# Altium PCB JLINK V8_V1.PcbDoc
Units mm, origin at the board's own origin, x right, y up, seen from the top; angles counter-clockwise.
Board outline 69.48 x 46.62 mm, 2 copper layers (Top Layer, Bottom Layer); 71 components, 76 nets, 356 pads, 91 vias.
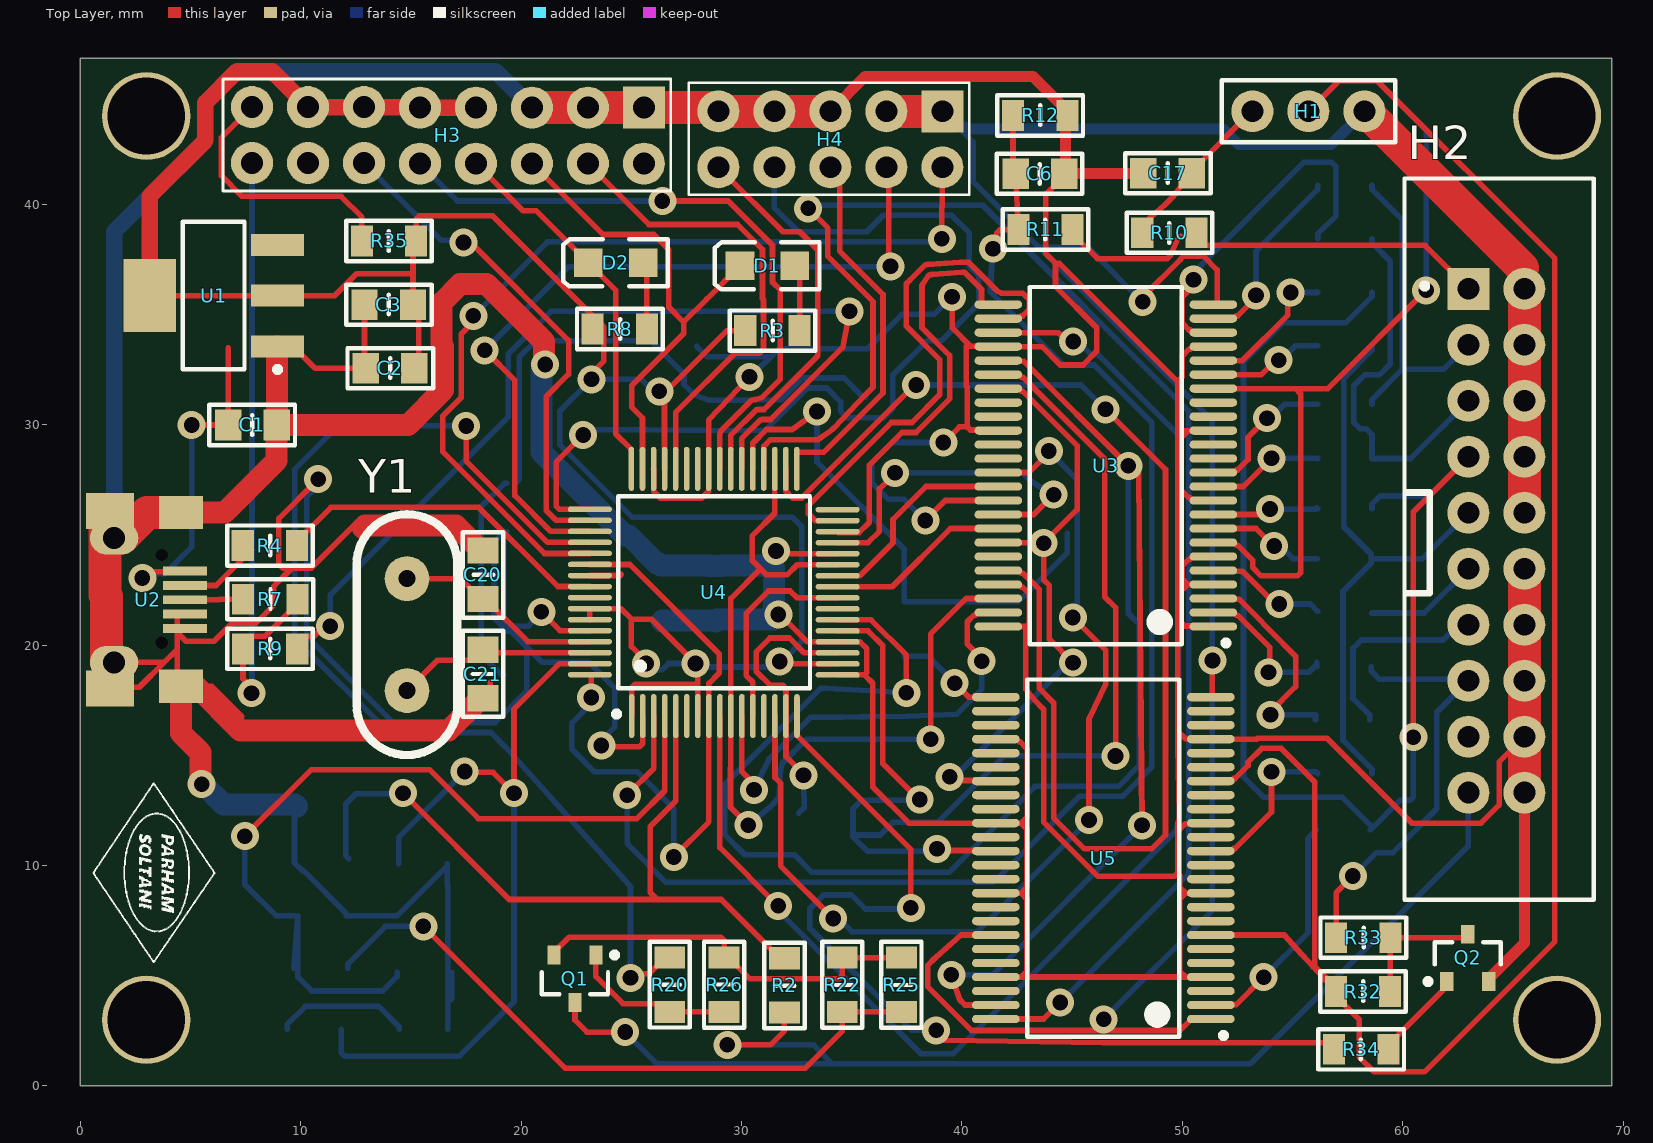
[diagram p0: Top Layer view]
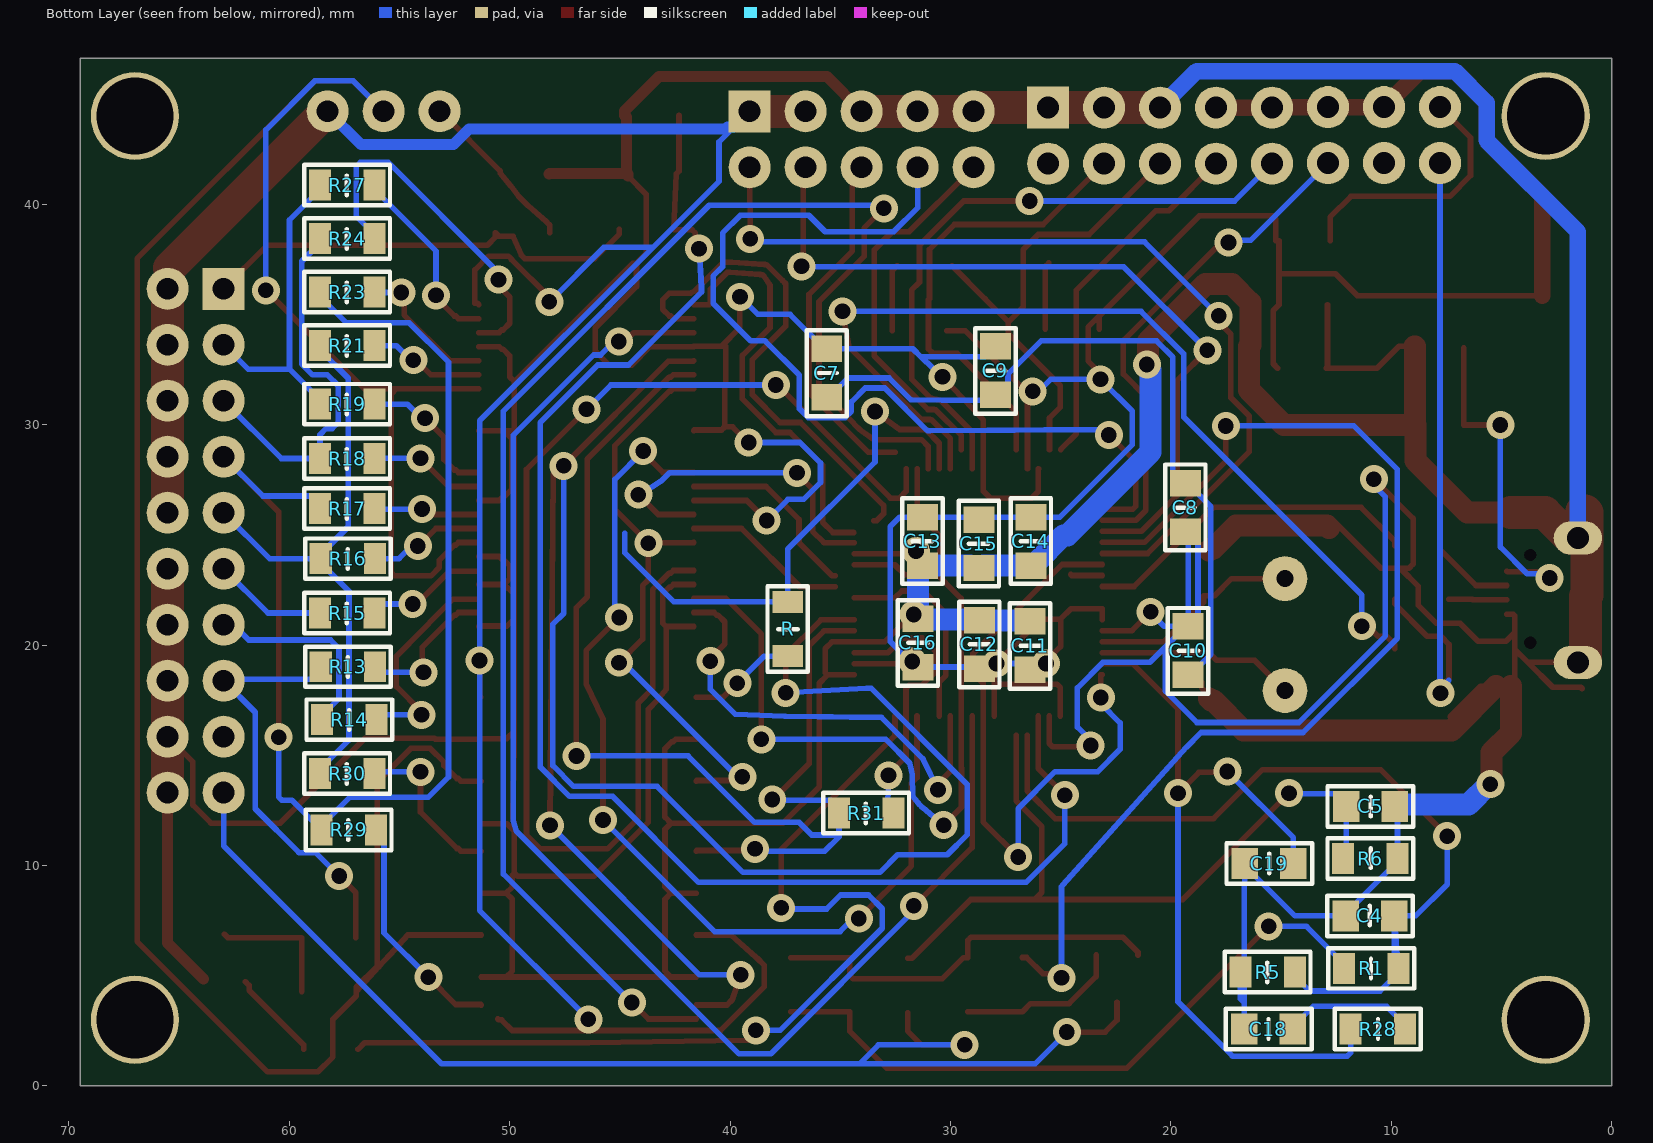
[diagram p1: Bottom Layer view, seen from below]

## Layer stack, top to bottom
Top Solder: solder mask 0.0102, Solder Resist, Dk 3.5
Top Layer: signal copper 0.0356
Dielectric 1: dielectric 0.32, FR-4, Dk 4.8
Bottom Layer: signal copper 0.0356
Bottom Solder: solder mask 0.0102, Solder Resist, Dk 3.5

## Board outline
0,0 69.485,0 69.485,46.624 0,46.624

## Design rules (kind name [scope] priority, off if disabled: settings)
Clearance POLYGON [InPolygon] p1: gap=0.635 ignorepadtopadclearanceinfootprint=FALSE except(0: Arc-Hole Track-Hole SMDPad-Hole THPad-Hole Via-Hole Fill-Hole Poly-Hole Region-Hole Text-Hole)
Clearance [All] p2: gap=0.305 ignorepadtopadclearanceinfootprint=TRUE except(0: Arc-Hole Track-Hole SMDPad-Hole THPad-Hole Via-Hole Fill-Hole Poly-Hole Region-Hole Text-Hole; 0.2: Arc-Arc Arc-Track Arc-SMDPad Track-Track Track-SMDPad SMDPad-SMDPad)
PlaneConnect [All] p1: planeconnectstyle=Direct reliefexpansion=0.508 reliefentries=4 reliefconductorwidth=0.254 reliefairgap=0.254
PolygonConnect [All] p1: connectstyle=Direct reliefconductorwidth=0.254 reliefentries=4 polygonreliefangle="90 Angle" airgapwidth=0.254
RoutingVias [All] p1: holewidth=0.711 width=1.27 viastyle="Through Hole" minholewidth=0.711 minwidth=1.27 maxholewidth=0.711 maxwidth=1.27
SolderMaskExpansion [All] p1: expansion=0.102 istentingtop=FALSE
Width [All] p1: maxlimit=5 minlimit=0.254 preferedwidth=0.254 minimp=50.000000 maximp=50.000000 favimp=50.000000
29 further rules are at their usual default settings.

## Components (designator, comment, footprint, x,y, rotation, side; value= is the part's Value field where it differs from the comment)
C1 "10uf" "CAP-0805 - better" 7.815,29.985 r0 top
C2 "10uf" "CAP-0805 - better" 14.06,32.557 r180 top
C3 "100uf" "CAP-0805 - better" 13.998,35.438 r180 top
C4 "100nf" "CAP-0805 - better" 10.98,7.711 r0 bottom
C5 "100nf" "CAP-0805 - better" 10.942,12.679 r180 bottom
C6 "100nf" "CAP-0805 - better" 43.539,41.38 r0 top
C7 "10uf" "CAP-0805 - better" 35.618,32.341 r90 bottom
C8 "100nf" "CAP-0805 - better" 19.347,26.236 r270 bottom
C9 "100nf" "CAP-0805 - better" 27.965,32.446 r90 bottom
C10 "100nf" "CAP-0805 - better" 19.224,19.75 r90 bottom
C11 "10uf" "CAP-0805 - better" 26.393,19.973 r90 bottom
C12 "100nf" "CAP-0805 - better" 28.693,20.035 r90 bottom
C13 "100nf" "CAP-0805 - better" 31.27,24.704 r270 bottom
C14 "100nf" "CAP-0805 - better" 26.356,24.704 r270 bottom
C15 "100nf" "CAP-0805 - better" 28.715,24.594 r270 bottom
C16 "100nf" "CAP-0805 - better" 31.483,20.103 r90 bottom
C17 "100nf" "CAP-0805 - better" 49.332,41.404 r180 top
C18 "10nf" "CAP-0805 - better" 15.577,2.578 r0 bottom
C19 "1nf" "CAP-0805 - better" 15.548,10.085 r0 bottom
C20 "22pf" "CAP-0805 - better" 18.274,23.189 r90 top
C21 "22pf" "CAP-0805 - better" 18.274,18.685 r270 top
D1 "LED" LED-SMD-0805 32.423,37.207 r180 top
D2 "LED" LED-SMD-0805 25.54,37.341 r180 top
H1 "Header 3" PIN-header3(copy) 58.261,44.216 r180 top
H2 "IDC-box-2*10" ICD-box_10*2 62.976,36.163 r270 top
H3 "IDC-box-2*8" "male-Header 2*8" 25.575,44.407 r180 top
H4 "IDC-box-2*5" "male-Header-2*5 - duplicate" 39.114,44.212 r180 top
Q1 "BC857a" sot23 22.447,4.863 r270 top
Q2 "BC847b" sot23 62.947,5.808 r90 top
R "0R" Res_SMD_0805 37.388,20.717 r270 bottom value=1K
R1 "10k" Res_SMD_0805 10.926,5.332 r0 bottom value=1K
R2 "10k" Res_SMD_0805 31.949,4.546 r270 top value=1K
R3 "330R" Res_SMD_0805 31.417,34.264 r0 top value=1K
R4 "47R" Res_SMD_0805 8.62,24.511 r0 top value=1K
R5 "10K" Res_SMD_0805 15.626,5.165 r0 bottom value=1K
R6 "10K" Res_SMD_0805 10.942,10.315 r180 bottom value=1K
R7 "47R" Res_SMD_0805 8.636,22.077 r0 top value=1K
R8 "330R" Res_SMD_0805 24.493,34.336 r0 top value=1K
R9 "1.5k" Res_SMD_0805 8.629,19.826 r0 top value=1K
R10 "4R7" Res_SMD_0805 49.401,38.703 r180 top value=1K
R11 "10K" Res_SMD_0805 43.779,38.855 r180 top value=1K
R12 "10K" Res_SMD_0805 43.564,44.024 r0 top value=1K
R13 "220R" Res_SMD_0805 57.352,19.016 r0 bottom value=1K
R14 "220R" Res_SMD_0805 57.287,16.614 r0 bottom value=1K
R15 "220R" Res_SMD_0805 57.385,21.452 r0 bottom value=1K
R16 "220R" Res_SMD_0805 57.352,23.92 r0 bottom value=1K
R17 "220R" Res_SMD_0805 57.385,26.19 r0 bottom value=1K
R18 "220R" Res_SMD_0805 57.385,28.461 r0 bottom value=1K
R19 "220R" Res_SMD_0805 57.385,30.929 r0 bottom value=1K
R20 "1K" Res_SMD_0805 26.745,4.58 r270 top
R21 "220R" Res_SMD_0805 57.385,33.587 r0 bottom value=1K
R22 "1R" Res_SMD_0805 34.573,4.576 r270 top value=1K
R23 "220R" Res_SMD_0805 57.385,36.014 r0 bottom value=1K
R24 "220R" Res_SMD_0805 57.385,38.441 r0 bottom value=1K
R25 "1R" Res_SMD_0805 37.253,4.576 r270 top value=1K
R26 "47k" Res_SMD_0805 29.214,4.602 r90 top value=1K
R27 "220R" Res_SMD_0805 57.385,40.868 r0 bottom value=1K
R28 "1k5" Res_SMD_0805 10.607,2.578 r180 bottom value=1K
R29 "220R" Res_SMD_0805 57.319,11.612 r0 bottom value=1K
R30 "220R" Res_SMD_0805 57.385,14.171 r0 bottom value=1K
R31 "1K" Res_SMD_0805 33.841,12.379 r0 bottom
R32 "10k" Res_SMD_0805 58.207,4.282 r0 top value=1K
R33 "220R" Res_SMD_0805 58.225,6.724 r0 top value=1K
R34 "10k" Res_SMD_0805 58.099,1.66 r180 top value=1K
R35 "1k5" Res_SMD_0805 13.998,38.334 r180 top value=1K
U1 "AMS1117-3V3" AMS1117-3V3 6.057,35.854 r90 top
U2 "USB-micro-B" USB-micro-b 3.057,22.054 r180 top
U3 "alvc164245" SSOP48 46.529,28.143 r180 top
U4 "AT91SAM7s64" LQFP-64 28.761,22.394 r90 top
U5 "alvc164245" SSOP48 46.416,10.336 r180 top
Y1 "8MHz" crystall 14.828,17.934 r90 top

## Footprints (in the part's own frame and the unit in brackets; to place one, negate y for a bottom-side part, rotate by r counter-clockwise, add the part's x,y. Pads: shape width x height; smd on the part's side, far side on the other; paste and mask are expansions set on the pad)
AMS1117-3V3 [mm]
  rect 1x2.4 smd: 1(-2.3,-2.9) 2(0,-2.9) 3(2.3,-2.9)
  rect 3.3x2.4 smd: 4(0,2.9)
  silkscreen extent -3.47,-3.03 3.35,1.4, body extent -3.24,-3.49 3.24,3.49, height 1.64
"CAP-0805 - better" [mm]
  rect 1.2x1.4 smd: 1(-1.1,0) 2(1.1,0)
  silkscreen extent -1.96,-0.91 1.93,0.91, body extent -1.04,-0.64 0.99,0.63, height 0.65
crystall [mil]
  round 80 hole 30: 1(0,0) 2(200,0)
  silkscreen extent -115,-90 315,90, body extent -123,-90 324,93, height 138
ICD-box_10*2 [mil]
  rect 75x75 hole 39: 1(0,0)
  round 75 hole 39: 2(0,100) 3(100,0) 4(100,100) 5(200,0) 6(200,100) 7(300,0) 8(300,100) 9(400,0) 10(400,100) 11(500,0) 12(500,100) 13(600,0) 14(600,100) 15(700,0) 16(700,100) 17(800,0) 18(800,100) 19(900,0) 20(900,100)
  silkscreen extent -197,-114 1091,224, body extent -196,-112 1092,223, height 350
LED-SMD-0805 [mm]
  rect 1.3x1.3 smd: 1(0,0) 2(2.489,0)
  silkscreen extent -1.12,-1.07 3.63,1.07, body extent 0.23,-0.63 2.26,0.64, height 1.1
LQFP-64 [mm]
  oval 2x0.25 smd: 1(-5.613,3.741) 2(-5.613,3.241) 3(-5.613,2.741) 4(-5.613,2.241) 5(-5.613,1.741) 6(-5.613,1.241) 7(-5.613,0.741) 8(-5.613,0.241) 9(-5.613,-0.259) 10(-5.613,-0.759) 11(-5.613,-1.259) 12(-5.613,-1.759) 13(-5.613,-2.259) 14(-5.613,-2.759) 15(-5.613,-3.259) 16(-5.613,-3.759) 33(5.601,-3.75) 34(5.601,-3.25) 35(5.601,-2.75) 36(5.601,-2.25) 37(5.601,-1.75) 38(5.601,-1.25) 39(5.601,-0.75) 40(5.601,-0.25) 41(5.601,0.25) 42(5.601,0.75) 43(5.601,1.25) 44(5.601,1.75) 45(5.601,2.25) 46(5.601,2.75) 47(5.601,3.25) 48(5.601,3.75)
  oval 0.25x2 smd: 17(-3.75,-5.601) 18(-3.25,-5.601) 19(-2.75,-5.601) 20(-2.25,-5.601) 21(-1.75,-5.601) 22(-1.25,-5.601) 23(-0.75,-5.601) 24(-0.25,-5.601) 25(0.25,-5.601) 26(0.75,-5.601) 27(1.25,-5.601) 28(1.75,-5.601) 29(2.25,-5.601) 30(2.75,-5.601) 31(3.25,-5.601) 32(3.75,-5.601) 49(3.761,5.639) 50(3.261,5.639) 51(2.761,5.639) 52(2.261,5.639) 53(1.761,5.639) 54(1.261,5.639) 55(0.761,5.639) 56(0.261,5.639) 57(-0.239,5.639) 58(-0.739,5.639) 59(-1.239,5.639) 60(-1.739,5.639) 61(-2.239,5.639) 62(-2.739,5.639) 63(-3.239,5.639) 64(-3.739,5.639)
  silkscreen extent -5.65,-4.35 4.35,4.55, body extent -6,-6 6,6, height 1.7
"male-Header 2*8" [mil]
  rect 75x75 hole 39: 1(0,1)
  round 75 hole 39: 2(0,101) 3(100,1) 4(100,101) 5(200,1) 6(200,101) 7(300,1) 8(300,101) 9(400,1) 10(400,101) 11(500,0) 12(500,100) 13(600,0) 14(600,100) 15(700,0) 16(700,100)
  silkscreen extent -48,-50 752,150, body extent -48,-51 752,149, height 336
"male-Header-2*5 - duplicate" [mil]
  rect 75x75 hole 39: 1(0,0)
  round 75 hole 39: 2(0,100) 3(100,0) 4(100,100) 5(200,0) 6(200,100) 7(300,0) 8(300,100) 9(400,0) 10(400,100)
  silkscreen extent -48,-51 453,149, body extent -48,-52 452,148, height 336
PIN-header3(copy) [mil]
  round 75 hole 39: 1(0,0) 2(100,0) 3(200,0)
  silkscreen extent -55,-55 255,55, body extent -49,-49 251,51, height 330
Res_SMD_0805 [mm]
  rect 1x1.4 smd: 1(-1.245,0) 2(1.219,0)
  silkscreen extent -1.96,-0.91 1.93,0.91, body extent -1,-0.63 1.03,0.64, height 0.6
sot23 [mm]
  rect 0.85x0.6 smd: 1(-1.075,0.95) 2(-1.075,-0.95) 3(1.075,0)
  silkscreen extent -1.2,-1.5 0.7,1.93, body extent -1.28,-1.5 1.22,1.5, height 1.05
SSOP48 [mil]
  oval 85x15 smd: 1(-192,287.5) 2(-192,262.5) 3(-192,237.5) 4(-192,212.5) 5(-192,187.5) 6(-192,162.5) 7(-192,137.5) 8(-192,112.5) 9(-192,87.5) 10(-192,62.5) 11(-192,37.5) 12(-192,12.5) 13(-192,-12.5) 14(-192,-37.5) 15(-192,-62.5) 16(-192,-87.5) 17(-192,-112.5) 18(-192,-137.5) 19(-192,-162.5) 20(-192,-187.5) 21(-192,-212.5) 22(-192,-237.5) 23(-192,-262.5) 24(-192,-287.5) 25(192,-287.5) 26(192,-262.5) 27(192,-237.5) 28(192,-212.5) 29(192,-187.5) 30(192,-162.5) 31(192,-137.5) 32(192,-112.5) 33(192,-87.5) 34(192,-62.5) 35(192,-37.5) 36(192,-12.5) 37(192,12.5) 38(192,37.5) 39(192,62.5) 40(192,87.5) 41(192,112.5) 42(192,137.5) 43(192,162.5) 44(192,187.5) 45(192,212.5) 46(192,237.5) 47(192,262.5) 48(192,287.5)
  silkscreen extent -219,-319 136,322, body extent -205,-315 205,315, height 104
USB-micro-b [mm]
  round 0 hole 0.55: 0(-0.643,1.952) 0(-0.643,-2.039)
  rect 2x0.4 smd paste-25.4 mask-25.4: 1(-1.705,-1.298) 2(-1.705,-0.648) 3(-1.705,0.002) 4(-1.705,0.652) 5(-1.705,1.302)
  rect 2x1.5 smd: 6(-1.521,3.924) 8(-1.521,-3.95)
  rect 2.159x1.651 smd: 7(1.705,4.026) 9(1.705,-4.026)
  oval 2.2x1.5 hole 1: 10(1.516,2.84) 11(1.516,-2.801)
  body extent -2,-5.89 28.93,6.11, height 5.5

## Part data
C1 C2 C3 C4 C5 C6 C7 C8 C9 C10 C11 C12 C13 C14 C15 C16 C17 C18 C19 C20 C21: library part CAP-0805
D1 D2: library part LED-SMD-RED
H1: library part "Header 1*3", "Header, 3-Pin", LatestRevisionDate=17-Jul-2002, LatestRevisionNote="Re-released for DXP Platform.", Publisher="Altium Limited"
H2: library part "Header 2*10"
H3: library part "Header 2*8"
H4: library part "Header 2*5", "Header, 5-Pin, Dual row", LatestRevisionDate=17-Jul-2002, LatestRevisionNote="Re-released for DXP Platform.", Publisher="Altium Limited"
Q1: library part PNP, "PNP Bipolar Transistor", LatestRevisionDate=29-May-2009, LatestRevisionNote="IPC-7351 Footprint Added.", PackageDescription="3-Pin SOT-23 Package 0.95 mm Pitch, 2.4 mm Lead Span", PackageReference=SOT-23B, PackageVersion=Aug-1999, Published=8-Jun-2000, Publisher="Altium Limited"
Q2: library part NPN, "NPN Bipolar Transistor", LatestRevisionDate=29-May-2009, LatestRevisionNote="IPC-7351 Footprint Added.", PackageDescription="3-Pin SOT-23 Package 0.95 mm Pitch, 2.4 mm Lead Span", PackageReference=SOT-23B, PackageVersion=Aug-1999, Published=8-Jun-2000, Publisher="Altium Limited"
R R1 R2 R3 R4 R5 R6 R7 R8 R9 R10 R11 R12 R13 R14 R15 R16 R17 R18 R19 R20 R21 R22 R23 R24 R25 R26 R27 R28 R29 R30 R31 R32 R33 R34 R35: library part Res, "Resistor", LatestRevisionDate=17-Jul-2002, LatestRevisionNote="Re-released for DXP Platform.", PackageDescription="Axial Device, Thru-Hole; 2 Leads; 0.3 in Pin Spacing", PackageReference=AXIAL-0.3, Published=8-Jun-2000, Publisher="Altium Limited"
U1: library part AMS1117IMP-(SOT-223), "x.x Volt, 800mA Low-Dropout Linear Regulator, 4-pin SOT-223", Manufacturer="National Semiconductor", PackageTopMarking=XYTT*N05B, PartNumber=LM1117IMP-3.3, PowerWise=N, Supplier Part Number 1=7614123, Code_IPC=SOT223-4, Code_JEDEC=TO-261-AA, ComponentLink1Description="LM1117 Datasheet", ComponentLink1URL=http://www.national.com/ds/LM/LM1117.pdf, ComponentLink2Description="LM1117 Web Page", ComponentLink2URL=http://www.national.com/pf/LM/LM1117.html, ComponentLink3Description="MP04A Package Page", ComponentLink3URL=http://www.national.com/packaging/folders/mp04a.html, CompType="LDO IC", DatasheetVersion=Apr-2006, PackageDescription="Molded SOT-223, 6.50 x 3.56 x 1.6mm Body, 4 Lead, 2.3mm Pitch", PackageReference=MP04A, PackageVersion="revB, Apr-2003", PinCount=4, Published=4-Dec-2008, Publisher="Altium Limited", RoHS=N, Supplier 1=Farnell
U3 U5: library part alvc164245(NXP)
U4: library part AT91SAM7S64(LQFP)
Y1: library part crystall, "XTAL Crystal", Company=E.P.I.L, Design Date=11/04/2011

## Free pads (board coordinates)
  round 4 hole 3.5: 1(3,3) 1(3,44) 1(67,3) 1(67,44)

## Via types
v1: diameter 1.27, hole 0.711, Top Layer to Bottom Layer, 91 vias

## Nets (pads, with @x,y where several pads share a name; then routed paths per layer and width w, separated by ;. In a path a pad name is that pad's centre, name@x,y a point inside that pad or via, vN(x,y) a via of type N, cw(c..) or ccw(c..) an arc to the next point about the centre after c; other vN are vias at no path point)
+3V3: C2.1 C3.1 C11.1 C12.1 C13.1 C14.1 C15.1 C16.1 H1.1 H2.2 H2.4 H2.6 H2.8 H2.10 H3.7 H3.9 H3.11 H3.13 H4.1 H4.3 R3.1 R8.1 R35.1 U1.2 U1.4 U3.24 U3.31 U3.42 U4.1 U4.7 U4.18 U4.45 U4.58 U4.59 U5.1 U5.24 U5.31 U5.42 | length 264.4
  Top Layer w0.254: U1.4 11.552,35.854 12.542,36.845 15.098,36.845 ; R35.1@15.098,38.334 15.098,36.845 ; C2.1 15.362,32.759 15.362,35.175 C3.1 15.098,36.845 ; R35.1 15.243,39.32 15.392,39.469 18.718,39.469 R8.1@23.248,34.939 ; U4.59 U4.58 24.523,21.655 25.005,21.173 ; v1(23.201,32.056) 23.201,32.331 23.756,32.886 23.756,34.431 R8.1@23.248,34.939 ; R8.1 R8.1@23.248,34.939 ; U4.1 25.02,18.075 25.169,18.224 27.871,18.224 28.02,18.075 ; v1(25.671,19.165) 25.671,19.269 25.005,19.935 25.005,21.173 ; U4.45 v1@26.511,31.003 ; v1@26.548,31.471 26.548,31.507 26.747,31.706 26.783,31.706 29.341,34.264 R3.1 ; v1@27.678,18.925 27.678,19.404 25.909,21.173 25.005,21.173 ; v1(27.918,19.165) 28.02,19.063 28.02,18.075 ; U4.7 28.02,18.075 ; v1(31.731,19.251) 31.836,19.146 34.36,19.146 U4.18 ; v1(39.446,14.021) 39.614,13.853 41.515,13.853 U5.31 ; U5.42 39.965,6.844 38.822,5.841 ccw(c39.525,5.038) 38.77,5.792 38.458,5.48 38.458,4.495 40.438,2.515 49.885,2.515 50.363,2.992 50.505,2.992 U5.1@50.546,3.034 ; U3.42 41.665,24.638 43.614,24.638 43.707,24.545 43.707,22.961 43.966,22.701 43.966,20.269 v1(45.038,19.197) ; U3.31 42.575,31.636 42.693,31.518 42.755,31.518 45.228,29.046 45.228,26.146 v1(43.707,24.625) ; v1(48.202,35.57) 48.202,35.777 49.917,37.492 49.917,37.494 49.928,37.513 cw(c50.149,37.389) 49.999,37.593 50.066,37.643 50.952,37.643 51.577,37.018 51.577,35.504 51.464,35.504 U3.24 ; U5.24@51.307,17.639 51.366,17.697 v1(51.366,19.298)
  Top Layer w0.75: U1.4 3.157,40.367 5.68,42.89 5.68,44.6 7.119,46.039 8.703,46.039 H3.13 H3.11 12.888,44.394 15.402,44.394 H3.9 H3.7
  Top Layer w1.5: H4.3 H4.1 ; H1.1 58.32,44.216 H2.2@65.439,37.097 ; H2.10 H2.2
  Bottom Layer w0.254: v1(23.201,32.056) 21.752,30.607 21.752,29.09 25.038,25.804 32.305,25.804 32.736,25.373 32.736,20.156 31.831,19.251 v1(31.731,19.251) C16.1 27.918,19.003 27.756,19.165 26.684,19.165 C11.1 25.962,18.873 v1(25.671,19.165) ; v1@23.201,32.106 23.251,32.056 25.458,32.056 26.043,31.471 v1@26.314,31.471 ; H4.1 H4.1@39.817,43.51 ; v1(39.446,14.021) 39.654,14.021 44.831,19.197 v1(45.038,19.197) ; 40.069,43.258 40.503,42.824 40.503,41.038 43.5,38.04 ; v1(46.431,3.023) 51.366,7.957 51.366,30.175 43.5,38.04 ; v1(48.202,35.57) 45.732,38.04 43.5,38.04
  Bottom Layer w0.5: H4.1@39.817,43.51 40.125,43.51 40.223,43.412 51.853,43.412 52.557,42.709 56.754,42.709 H1.1
  other v1: 26.277,31.512
+5V: C1.1 R1.2 R22.2 R25.2 U1.3 U2.1 | length 45.8
  Top Layer w0.254: v1(2.819,23.038) 3.094,23.038 3.381,23.325 4.735,23.325 U2.1 ; v1(5.055,29.985) C1.1 6.715,33.475 ; v1(15.57,7.239) 22.015,0.794 32.887,0.794 34.569,2.476 34.569,3.353 R22.2 R25.2
  Bottom Layer w0.254: v1(2.819,23.038) 3.011,23.229 3.835,23.229 5.055,24.448 v1(5.055,29.985) ; R1.2 12.146,5.532 13.853,7.239 v1(15.57,7.239)
+18V: C7.1 C8.1 C9.1 C10.1 U4.8 U4.12 U4.24 U4.54 U4.64 | length 72.4
  Top Layer w0.254: U4.64 23.176,18.655 23.178,18.653 v1(23.178,17.618) ; U4.54 24.936,23.655 28.985,19.606 28.985,18.723 28.52,18.258 28.52,11.977 v1(26.93,10.387) ; U4.12 30.52,18.311 30.21,18.621 30.21,21.434 31.227,22.451 32.204,22.451 32.512,22.144 U4.24
  Bottom Layer w0.254: C10.1 19.124,18.65 18.197,19.577 18.197,26.285 19.247,27.336 C8.1 ; C8.1@19.743,27.336 19.92,27.513 19.92,33.066 20.651,33.797 25.888,33.797 27.392,32.293 27.392,31.819 27.865,31.346 28.538,31.103 30.364,31.103 ccw(c30.365,32.17) 30.385,31.103 31.807,31.131 31.881,31.205 32.789,32.113 34.646,32.113 35.518,31.241 C7.1 ; v1@23.175,17.618 23.175,17.339 22.307,16.471 22.307,15.27 23.319,14.259 25.256,14.259 26.93,12.584 v1(26.93,10.387)
AD4: C6.1 R11.2 R12.1 U4.3 | length 67.4
  Top Layer w0.254: v1(24.814,13.192) 26.02,14.398 U4.3 ; v1(41.408,37.982) 41.576,38.15 41.576,38.688 41.725,38.837 42.541,38.837 R11.2 C6.1 42.319,41.499 R12.1
  Bottom Layer w0.254: v1(24.814,13.192) 24.814,10.995 26.573,9.236 41.427,9.236 45.324,13.132 47.284,13.132 48.615,14.463 48.615,30.096 46.006,32.706 44.61,32.706 41.299,36.017 41.299,36.227 v1(41.408,37.982)
AD5: C4.1 R1.1 R5.1 U4.4 | length 39.9
  Top Layer w0.254: v1(7.468,11.328) 10.486,14.347 15.848,14.347 18.07,12.125 25.256,12.125 26.52,13.389 U4.4@26.52,15.908
  Bottom Layer w0.254: v1(7.468,11.328) 7.468,9.144 8.901,7.711 C4.1 ; R1.1 C4.1 ; R5.1 14.381,4.965 13.722,4.305 10.509,4.305 9.88,4.934 C4.1
AD6: C5.1 R2.1 R6.1 U4.5 | length 33.8
  Top Layer w0.254: v1(14.645,13.28) 19.466,8.458 26.187,8.458 ; U4.5@27.02,15.908 27.02,12.923 25.863,11.767 25.863,8.782 26.187,8.458 ; R2.1 31.749,5.791 29.082,8.458 26.187,8.458
  Bottom Layer w0.254: R6.1 12.042,10.46 12.042,12.779 12.515,13.252 14.617,13.252 v1(14.645,13.28)
ERS: H3.14 U4.55 | length 1.4
  Top Layer w0.254: U4.55 24.504,23.155 24.55,23.201
GND: C1.2 C2.2 C3.2 C4.2 C5.2 C6.2 C7.2 C8.2 C9.2 C10.2 C11.2 C12.2 C13.2 C14.2 C15.2 C16.2 C17.2 C18.2 C19.2 C20.2 C21.2 H2.12 H2.14 H2.16 H2.18 H2.20 H3.1 H3.3 H3.5 H4.5 H4.7 H4.9 Q2.2 R5.2 R6.2 R12.2 U1.1 U2.4 U2.5 U2.6 U2.7 U2.8 U2.9 U2.10 U2.11 U3.1 U3.4 U3.6 U3.10 U3.15 U3.21 U3.28 U3.34 U3.39 U3.45 U3.48 U4.2 U4.17 U4.20 U4.28 U4.41 U4.46 U4.60 U5.4 U5.10 U5.15 U5.21 U5.28 U5.34 U5.39 U5.45 | length 497.2
  Top Layer w0.254: U2.7 1.406,18.083 2.681,18.083 3.812,19.214 ; U2.10 3.812,19.214 ; 4.578,16.002 4.407,16.173 4.407,19.809 ; U2.6 5.261,18.13 5.945,18.13 7.328,16.747 ; U2.4 4.48,21.402 4.407,21.329 U2.5@4.407,20.569 ; U1.1 9.657,33.554 10.654,32.557 C2.2 12.898,32.619 C3.2 ; v1(10.799,27.525) 9.013,25.739 9.013,23.675 9.204,23.484 9.6,23.484 ; 12.563,25.572 10.475,23.484 ; 12.826,25.31 12.301,25.31 10.475,23.484 ; 16.934,16.747 17.335,16.747 17.874,17.285 17.874,17.686 18.234,17.686 18.606,18.058 18.606,18.318 ; v1(20.918,21.506) 21.767,20.657 23.12,20.657 U4.60 ; v1(23.645,15.441) 23.7,15.386 25.371,15.386 25.52,15.535 U4.2 ; U4.46 26.013,27.993 26.013,26.979 26.323,26.668 28.198,26.668 28.509,26.979 28.509,27.993 U4.41 28.511,30.211 v1(30.365,32.17) ; v1(31.565,24.265) 31.684,24.146 34.36,24.146 U4.28 ; v1(31.669,21.385) 31.748,21.385 32.989,20.144 U4.20 34.364,20.142 35.378,20.142 35.689,19.831 35.689,18.746 35.586,18.644 U4.17 ; 35.624,18.603 35.958,18.269 35.958,13.566 37.6,11.924 U5.34 41.546,11.917 42.68,11.917 ; v1(38.338,25.651) 39.243,26.556 U3.39 ; v1(39.16,29.19) 39.18,29.19 39.888,29.898 40.245,29.898 40.245,31.697 40.191,31.751 40.191,33.549 40.403,33.549 ; v1(39.555,35.799) 39.555,34.397 40.403,33.549 ; 40.263,29.88 40.389,29.755 41.628,29.755 U3.34 ; U5.45 42.674,4.939 ; U5.39 42.674,8.749 ; U5.28 42.463,15.734 42.58,15.616 42.643,15.616 42.961,15.298 42.961,12.199 42.68,11.917 ; U3.48 42.904,20.841 ; U3.45 42.575,22.746 42.693,22.628 42.755,22.628 43.058,22.325 43.058,20.995 42.904,20.841 ; C6.2@44.639,41.28 43.806,40.447 43.806,37.767 44.247,37.327 ; C17.2@48.208,41.38 C17.2 ; U5.4 50.159,4.939 ; U5.10 50.159,8.749 ; U5.15 51.269,11.899 50.135,11.899 49.784,11.549 ; U3.1 51.381,20.865 50.128,20.865 49.784,21.209 ; U3.4 50.259,22.746 ; U3.6 50.482,24.016 50.365,23.898 50.302,23.898 49.983,23.58 49.983,23.021 50.259,22.746 ; U3.10 50.482,26.556 50.365,26.673 50.302,26.673 49.894,27.081 49.894,29.353 50.271,29.731 ; U3.15 50.271,29.731 ; U3.21 50.482,33.541 50.365,33.423 50.302,33.423 49.999,33.12 49.999,32.168 49.784,31.953 ; Q2.2 Q2.2@63.897,4.858 ; H2.20@65.516,13.167 H2.20 ; H2.18 64.375,14.702 64.375,12.744 63.55,11.919 60.409,11.919 56.558,15.769 53.418,15.769 53.382,15.734 U5.21 51.269,15.758 50.135,15.758 49.784,16.109 ; 3.812,19.214 4.407,19.809 ; 4.407,19.809 U2.5@4.407,20.569 ; U2.5@4.407,20.569 4.805,20.171 6.068,20.171 6.876,20.98 7.957,20.98 8.778,21.801 8.778,22.662 9.6,23.484 ; 9.6,23.484 10.475,23.484 ; 40.403,33.549 41.643,33.549 U3.28 43.629,33.541 44.464,32.706 45.494,32.706 46.118,33.331 46.118,34.393 44.247,36.265 44.247,37.327 ; 42.674,4.939 50.159,4.939 ; 42.674,4.939 42.955,5.22 42.955,8.467 42.674,8.749 ; 42.674,8.749 42.955,9.03 42.955,11.642 42.68,11.917 ; 42.904,20.841 42.904,18 43.3,17.499 43.71,17.089 43.71,11.97 46.176,9.504 49.635,9.504 49.784,9.653 ; 44.247,37.327 44.41,37.327 49.784,31.953 ; 49.784,9.653 49.784,11.549 ; 49.784,9.653 49.877,9.559 49.877,9.03 50.159,8.749 ; 49.784,11.549 49.784,11.892 ccw(c48.799,12.301) 49.865,12.329 49.784,15.39 49.784,16.109 ; 49.784,16.109 49.784,21.209 ; 49.784,21.209 49.784,22.3 ; 49.784,22.3 49.784,29.731 ; 49.784,22.3 50.259,22.746 ; 49.784,29.731 50.271,29.731 ; 49.784,29.731 49.784,31.953 ; 50.159,4.939 49.877,5.22 49.877,8.467 50.159,8.749
  Top Layer w0.5: H4.5 35.606,45.785 43.222,45.785 44.783,44.224 R12.2 44.711,43.952 C6.2@44.711,41.392 ; C6.2@44.639,41.28 44.711,41.352 C6.2@44.711,41.392 ; C6.2 44.651,41.392 C6.2@44.711,41.392 ; C17.2@48.208,41.38 48.196,41.392 C6.2@44.711,41.392 ; Q2.2@63.897,4.858 65.516,6.478 H2.20@65.516,13.167
  Top Layer w1: U2.6 4.578,16.002 5.459,15.121 5.459,13.737 v1(5.51,13.685) ; U2.8 6.552,26.004 8.916,28.368 C1.2 ; U2.6@5.261,18.13 7.278,16.113 16.702,16.113 18.074,17.485 18.174,17.485 C21.2 ; U1.1 8.936,33.554 8.936,30.005 C1.2 ; 12.826,25.31 12.932,25.416 17.047,25.416 18.074,24.389 18.174,24.389 C20.2 ; v1(21.093,32.73) 21.041,32.782 21.041,33.769 18.434,36.376 17.242,36.376 16.398,35.533 16.398,33.609 16.46,33.547 16.46,31.567 14.878,29.985 C1.2
  Top Layer w1.5: U2.9 1.205,26.08 1.13,26.004 1.13,22.275 1.191,22.214 1.191,19.214 U2.10 ; U2.11 1.891,24.855 3.04,26.004 U2.8 ; H3.5 28.676,44.381 28.845,44.212 H4.9 H4.7 H4.5 ; H2.20 H2.18 H2.12
  Bottom Layer w0.254: C5.2 9.722,12.56 9.722,10.115 10.095,9.742 10.148,9.742 12.08,7.811 C4.2 14.374,7.711 C19.2@16.648,9.985 ; v1(10.799,27.525) 10.799,27.25 10.272,26.724 10.272,20.411 14.198,16.486 18.822,16.486 20.251,17.914 20.251,19.923 ; C19.2 C19.2@16.648,9.985 ; R5.2@16.677,5.165 16.677,9.116 16.648,9.144 C19.2@16.648,9.985 ; C18.2 16.677,3.785 ; R5.2@16.677,5.165 16.677,3.785 ; R5.2 16.845,3.952 16.677,3.785 ; C10.2@19.719,20.454 C10.2@19.719,20.85 ; v1@20.955,21.465 20.919,21.465 20.305,20.85 C10.2 19.224,25.012 C8.2 19.247,25.136 18.774,24.663 18.774,21.221 19.356,20.639 19.534,20.639 20.955,19.218 23.087,19.218 24.245,18.06 24.245,16.278 23.683,15.715 v1@23.683,15.4 ; C9.2 28.438,33.073 31.346,33.073 ; v1(30.365,32.17) 31.212,32.939 31.346,33.073 ; v1(38.338,25.651) 37.379,26.609 36.664,26.609 35.899,27.374 35.899,28.257 36.832,29.19 v1(39.16,29.19) ; v1(39.555,35.799) 38.74,34.999 37.275,34.999 35.718,33.441 31.714,33.441 31.346,33.073
  Bottom Layer w0.75: U2.11 1.541,38.751 5.68,42.89 5.68,44.6 7.119,46.039 18.837,46.039 H3.5
  Bottom Layer w1: v1(5.51,13.685) 5.583,13.685 6.501,12.768 9.753,12.768 C5.2 ; v1(21.093,32.73) 21.093,32.657 20.925,32.489 20.925,28.747 24.695,24.977 24.883,24.977 26.156,23.704 26.256,23.704 C14.2 28.505,23.604 28.515,23.594 29.115,23.594 29.125,23.604 C13.2 ; C11.2 26.423,21.104 28.792,21.104 28.823,21.073 28.823,21.099 28.892,21.169 31.449,21.169 C16.2 ; C16.2@31.483,21.303 C13.2@31.483,23.492
J_RST: H2.15 R13.2 R33.1 | length 19.4
  Top Layer w0.254: R33.1 56.98,8.764 v1(57.736,9.52)
  Bottom Layer w0.254: v1(57.736,9.52) 58.802,10.585 59.558,10.585 61.545,12.572 61.545,16.951 H2.15 62.916,18.443 58.944,18.443 58.571,18.816 R13.2
J_RTCK: H2.11 R15.2 | length 5.2
  Bottom Layer w0.254: R15.2 60.965,21.452 H2.11
J_TCK: H2.9 R16.2 R21.2 R30.2 | length 26.8
  Bottom Layer w0.254: R30.2 58.604,14.371 57.29,15.685 57.29,22.439 58.572,23.72 R16.2 ; R21.2 58.604,33.387 57.323,32.106 57.323,25.368 58.572,24.12 R16.2 ; H2.9 60.893,23.92 R16.2
J_TDI: H2.5 R18.2 R24.2 | length 17.4
  Bottom Layer w0.254: R24.2 58.604,38.241 59.431,37.414 59.431,32.751 58.938,32.258 58.271,32.258 57.777,31.764 57.777,30.093 58.053,29.817 58.328,29.817 58.604,29.542 R18.2 60.354,28.461 H2.5
J_TDO: H2.13 R14.2 | length 9.2
  Bottom Layer w0.254: R14.2 58.506,16.814 57.744,17.576 57.744,19.852 58.122,20.229 61.836,20.229 62.529,20.923 H2.13
J_TMS: H2.7 R17.2 R23.2 R29.2 | length 57.3
  Top Layer w0.254: v1(60.478,15.822) 60.478,26.044 H2.7
  Bottom Layer w0.254: R29.2 59.883,12.957 60.332,12.957 60.48,13.106 60.48,15.82 v1(60.478,15.822) ; R29.2@58.538,11.812 57.253,13.098 53.69,13.098 52.777,14.011 52.777,32.835 54.555,34.614 57.404,34.614 58.604,35.814 R23.2 ; R17.2 58.604,26.39 58.977,26.763 61.196,26.763 H2.7
J_TRST: H2.3 R19.2 R27.2 | length 14.5
  Bottom Layer w0.254: R19.2 58.604,31.129 59.99,32.514 ; R27.2 58.604,40.668 59.99,39.282 59.99,32.514 ; H2.3 61.868,32.514 59.99,32.514
JSEL: H3.12 U4.50 | length 22.9
  Top Layer w0.254: v1(17.391,38.261) 17.585,38.067 17.913,38.067 22.16,33.82 22.16,32.288 21.138,31.266 21.138,26.115 21.599,25.655 U4.50
  Bottom Layer w0.254: H3.12 16.375,38.367 17.284,38.367 v1(17.391,38.261)
NetC17_1: C17.1 H1.3 R10.2 | length 7.6
  Top Layer w0.254: R10.2 48.182,39.048 48.331,39.197 49.156,39.923 49.613,40.38 49.959,40.831 C17.1 50.432,41.504 53.145,44.216 H1.3
NetC18_1: C18.1 R28.2 | length 6.1
  Bottom Layer w0.254: R28.2 9.388,2.778 10.215,3.605 13.55,3.605 14.477,2.678 C18.1
NetD1_1: D1.1 R3.2 | length 3
  Top Layer w0.254: D1.1 32.636,36.993 R3.2
NetD2_1: D2.1 R8.2 | length 3.1
  Top Layer w0.254: D2.1 25.712,37.168 R8.2
NetH2_1: H2.1 R10.1 R11.1 | length 20.5
  Top Layer w0.254: R11.1 45.023,38.655 46.147,37.531 49.314,37.531 49.463,37.68 49.844,38.554 50.497,38.554 R10.1 50.646,38.503 51.019,38.13 61.009,38.13 H2.1
NetH3_15: H3.15 R35.2 | length 11.9
  Top Layer w0.254: H3.15 6.411,43.023 6.411,41.293 7.35,40.354 11.84,40.354 12.779,39.415 R35.2
NetQ1_1: Q1.1 R20.2 R26.1 | length 7.5
  Top Layer w0.254: Q1.1 23.397,4.965 24.628,3.734 26.372,3.734 R20.2 29.21,3.361 R26.1
NetQ1_2: Q1.2 R22.1 R25.1 R26.2 | length 18.3
  Top Layer w0.254: Q1.2 21.497,6.063 22.187,6.753 29.065,6.753 29.214,6.604 R26.2 29.414,5.821 30.367,4.868 34.425,4.868 34.573,5.016 R22.1 R25.1
NetQ2_1: Q2.1 R34.1 | length 4.2
  Top Layer w0.254: R34.1 59.344,1.86 61.824,4.34 61.824,4.56 Q2.1
NetQ2_3: Q2.3 R32.2 R33.2 | length 6
  Top Layer w0.254: R32.2 59.426,6.705 R33.2 62.787,6.724 Q2.3
NetR4_1: R4.1 U2.2 | length 3.7
  Top Layer w0.254: U2.2 6.163,22.702 R4.1@7.771,24.311
NetR7_1: R7.1 U2.3 | length 2.6
  Top Layer w0.254: U2.3 6.314,22.052 6.339,22.077 R7.1
NetR13_1: R13.1 U3.2 | length 7
  Top Layer w0.254: U3.2 52.329,21.476 52.446,21.358 52.509,21.358 53.962,19.905 53.962,18.812 v1(53.912,18.762)
  Bottom Layer w0.254: v1(53.912,18.762) 55.735,18.762 56.108,19.135 56.108,19.207 R13.1
NetR14_1: R14.1 U3.3 | length 10.2
  Top Layer w0.254: U3.3 51.43,22.086 52.571,22.086 53.371,21.286 53.938,20.697 55.143,19.492 55.143,18.116 54.002,16.974 v1(54.002,16.836)
  Bottom Layer w0.254: v1(54.002,16.836) 56.02,16.836 56.042,16.814 R14.1
NetR15_1: R15.1 U3.5 | length 5.5
  Top Layer w0.254: U3.5 51.43,23.356 52.718,23.356 54.215,21.86 v1(54.399,21.86)
  Bottom Layer w0.254: v1(54.399,21.86) 55.809,21.86 R15.1@56.14,21.528
NetR16_1: R16.1 U3.8 | length 5.3
  Top Layer w0.254: U3.8 53.351,25.286 54.14,24.497 v1(54.168,24.497)
  Bottom Layer w0.254: v1(54.168,24.497) 54.443,24.497 55.02,23.92 R16.1
NetR17_1: R17.1 U3.9 | length 4.9
  Top Layer w0.254: U3.9 53.455,25.921 53.705,26.17 v1(53.975,26.17)
  Bottom Layer w0.254: v1(53.975,26.17) 53.99,26.156 56.039,26.156 56.107,26.224 R17.1
NetR18_1: R18.1 U3.11 | length 5.3
  Top Layer w0.254: U3.11 52.768,27.191 v1(54.045,28.468)
  Bottom Layer w0.254: v1(54.045,28.468) 56.133,28.468 R18.1
NetR19_1: R19.1 U3.12 | length 6.6
  Top Layer w0.254: U3.12 52.329,27.826 52.446,27.943 52.509,27.943 52.979,28.413 52.979,29.429 v1(53.844,30.294)
  Bottom Layer w0.254: v1(53.844,30.294) 54.01,30.294 54.645,30.929 R19.1
NetR21_1: R21.1 U3.19 | length 5.3
  Top Layer w0.254: U3.19 53.586,32.271 54.236,32.921 v1(54.372,32.921)
  Bottom Layer w0.254: v1(54.372,32.921) 54.487,32.921 55.148,33.582 56.136,33.582 R21.1
NetR23_1: R23.1 U3.20 | length 6.5
  Top Layer w0.254: U3.20 52.718,32.906 54.788,34.976 54.788,35.866 v1(54.914,35.992)
  Bottom Layer w0.254: v1(54.914,35.992) 56.119,35.992 R23.1
NetR24_1: R24.1 U3.22 | length 16.3
  Top Layer w0.254: v1(50.51,36.576) 50.51,36.301 49.999,35.79 49.999,34.596 50.302,34.293 50.365,34.293 50.482,34.176 U3.22
  Bottom Layer w0.254: v1(50.51,36.576) 50.705,36.77 50.705,37.094 55.505,41.895 56.776,41.895 56.967,41.703 56.967,39.468 56.14,38.641 R24.1
NetR27_1: R27.1 U3.23 | length 8.6
  Top Layer w0.254: U3.23 52.329,34.811 52.446,34.928 52.509,34.928 53.344,35.763 v1(53.344,35.866)
  Bottom Layer w0.254: v1(53.344,35.866) 53.344,37.871 56.14,40.668 R27.1
NetR29_1: R29.1 U5.2 | length 10.6
  Top Layer w0.254: U5.2 51.317,3.693 52.451,3.693 v1(53.69,4.932)
  Bottom Layer w0.254: v1(53.69,4.932) 55.702,6.943 55.702,11.239 R29.1
NetR30_1: R30.1 U5.13 | length 7.4
  Top Layer w0.254: U5.13 52.216,10.654 52.334,10.771 52.396,10.771 54.048,12.422 v1(54.048,14.249)
  Bottom Layer w0.254: v1(54.048,14.249) 56.063,14.249 R30.1
NetR_2: R.2 U5.25 | length 4.9
  Top Layer w0.254: v1(39.675,18.274) 40.31,17.639 U5.25
  Bottom Layer w0.254: R.2 38.451,19.497 v1(39.675,18.274)
PA0: D2.2 H3.8 U4.48 | length 16.2
  Top Layer w0.254: H3.8 20.102,39.695 20.697,39.695 24.291,36.1 24.291,29.586 U4.48@25.009,28.868
PA1: D1.2 H3.6 U4.47 | length 22
  Top Layer w0.254: H3.6 23.713,38.624 26.019,38.624 26.699,37.944 26.699,35.332 27.379,34.652 ; U4.47@25.511,28.868 25.511,30.298 25.018,30.791 25.018,31.761 27.379,34.122 27.379,34.652 ; D1.2 28.433,35.707 27.379,34.652
PA2: H3.4 U4.44 | length 20.9
  Top Layer w0.254: H3.4 25.799,39.078 29.825,39.078 30.954,37.948 30.954,35.711 30.999,35.666 30.999,33.428 30.808,33.237 29.701,33.237 27.011,30.547 U4.44@27.011,28.868
PA4: U4.36 U5.48 | length 69.9
  Top Layer w0.254: U4.36 31.013,27.997 31.013,29.011 31.323,29.322 33.492,29.322 34.054,29.728 ccw(c33.429,30.593) 34.201,29.857 35.632,31.357 35.969,31.694 35.969,35.581 33.917,37.632 33.917,38.921 v1@33.088,39.75 ; U5.48 43.708,3.034 v1(44.461,3.786)
  Bottom Layer w0.254: v1@33.061,39.773 33.238,39.95 40.948,39.95 50.284,30.615 50.284,9.609 v1(44.461,3.786)
  other v1: 33.024,39.814
PA6: U3.44 U4.34 | length 57.4
  Top Layer w0.254: U4.34 32.013,27.993 32.013,26.979 32.323,26.668 32.73,26.668 37.857,31.796 v1(37.926,31.796) ; U3.44 42.575,23.381 42.693,23.263 42.762,23.263 43.512,22.513 43.512,18.034 44.164,17.382 44.164,12.158 45.566,10.756 48.611,10.756 49.236,11.381 49.236,27.968 v1(46.513,30.69)
  Bottom Layer w0.254: v1(37.926,31.796) 45.407,31.796 v1(46.513,30.69)
PA8: U3.26 U4.31 | length 23.3
  Top Layer w0.254: U4.31@33.489,25.646 33.346,25.646 33.035,25.957 33.035,26.331 36.801,30.097 37.735,30.097 38.992,31.354 38.992,32.948 37.475,34.465 37.475,36.285 37.475,36.39 37.624,36.539 38.351,37.257 38.417,37.262 38.437,37.263 39.929,37.366 40.305,37.366 41.576,36.095 41.6,36.071 41.787,35.963 42.755,35.963 43.058,35.66 43.058,35.231 42.755,34.928 42.693,34.928 42.575,34.811 U3.26
PA9: U3.25 U4.30 | length 19.4
  Top Layer w0.254: U4.30@34.399,25.103 34.401,25.105 35.337,25.105 35.803,25.571 35.803,28.161 37.285,29.643 37.923,29.643 39.446,31.166 39.446,33.136 38.191,34.392 38.191,36.325 38.455,36.719 38.54,36.804 38.635,36.811 40.01,36.904 40.124,36.904 40.199,36.83 40.89,36.139 40.89,35.504 40.948,35.446 U3.25
PA10: U3.40 U4.29 | length 15.5
  Top Layer w0.254: U4.29 35.743,24.644 36.257,25.159 36.257,27.088 36.966,27.796 v1(36.966,27.816) ; U3.40 43.259,25.921 v1(44.161,26.822)
  Bottom Layer w0.254: v1(36.966,27.816) 42.744,27.816 43.062,27.498 43.102,27.466 44.077,26.822 v1(44.161,26.822)
PA12: U3.46 U4.10 U4.27 U4.35 | length 40.6
  Top Layer w0.254: v1(30.313,11.83) 29.501,12.642 29.501,14.403 29.52,14.422 29.52,22.117 30.862,23.459 ; U4.35 31.511,25.979 30.498,24.966 30.498,23.823 31.123,23.198 32.083,23.198 32.529,23.644 U4.27 ; v1(38.583,15.723) 38.583,20.502 40.191,22.111 U3.46
  Bottom Layer w0.254: v1(30.313,11.83) 31.251,12.611 ccw(c30.568,13.43) 31.388,12.748 31.715,13.141 31.745,14.126 cw(c32.811,14.092) 31.777,14.352 31.848,14.638 32.933,15.723 v1(38.583,15.723)
PA13: U3.29 U4.22 U5.47 | length 92
  Top Layer w0.254: U4.22 35.885,21.144 37.479,19.55 v1(37.479,17.833) ; v1(39.525,5.038) 39.901,3.908 40.141,3.669 U5.47 ; U3.29 41.676,32.881 42.801,32.881 v1(47.549,28.133) 47.656,28.133 48.016,27.774 v1(48.169,11.823)
  Bottom Layer w0.254: v1(37.479,17.833) 33.805,18.034 33.594,18.034 29.247,13.686 29.247,11.388 30.147,10.488 32.402,10.488 33.2,9.69 39.415,9.69 43.312,13.586 47.096,13.586 48.038,14.528 48.038,20.949 47.549,21.438 v1(47.549,28.133) ; v1(39.525,5.038) 41.384,5.038 v1(48.169,11.823)
PA14: R31.2 U3.30 U4.21 U5.36 | length 54.8
  Top Layer w0.254: U4.21 35.743,20.644 36.412,19.975 36.412,14.621 38.042,12.991 v1(38.088,12.991) ; v1(38.87,10.757) 38.949,10.678 41.515,10.678 U5.36 ; U3.30 42.575,32.271 42.693,32.153 42.762,32.153 46.482,28.434 46.482,22.188 46.985,21.685 46.985,14.984 v1(46.971,14.97)
  Bottom Layer w0.254: 35.06,11.382 36.294,11.382 36.864,11.952 38.886,11.952 41.904,14.97 v1(46.971,14.97) ; v1(38.088,12.991) 38.049,12.952 35.433,12.952 35.433,12.944 35.06,12.571 35.06,11.298 35.704,10.654 38.767,10.654 v1(38.87,10.757)
PA17: U3.27 U4.9 | length 62.9
  Top Layer w0.254: U4.9 29.02,10.811 v1(31.662,8.169) ; U3.27 44.374,34.176 44.777,33.773 v1(45.052,33.773)
  Bottom Layer w0.254: v1@31.699,8.128 31.699,7.908 38.154,1.453 39.589,1.453 49.71,11.574 49.83,12.028 49.83,29.524 46.194,33.16 45.876,33.16 45.263,33.773 v1(45.052,33.773)
PA20: R34.2 U4.16 | length 42.9
  Top Layer w0.254: U4.16 32.52,15.892 37.683,10.728 v1(37.683,8.082) ; v1(38.83,2.52) 38.999,2.19 39.07,2.118 39.194,2.078 46.415,1.956 ccw(c46.431,3.023) 46.431,1.956 56.585,1.956 R34.2
  Bottom Layer w0.254: v1(37.683,8.082) 37.628,8.026 35.62,8.026 34.985,8.661 33.721,8.661 33.096,8.036 33.096,7.153 37.729,2.52 v1(38.83,2.52)
PA21: U3.47 U4.11 | length 20.9
  Top Layer w0.254: U4.11 30.02,14.253 30.568,13.705 v1(30.568,13.43) ; v1(40.895,19.269) 40.895,19.405 40.245,20.055 40.245,21.055 40.548,21.358 40.611,21.358 40.728,21.476 U3.47
  Bottom Layer w0.254: v1(30.568,13.43) 31.245,14.828 33.132,16.715 37.491,16.766 ccw(c37.479,17.833) 37.524,16.767 39.774,16.864 40.895,17.986 v1(40.895,19.269)
PA22: U3.37 U4.14 | length 45.1
  Top Layer w0.254: U4.14 31.52,13.987 31.774,13.733 31.774,9.984 v1(34.163,7.595) ; U3.37 43.049,27.826 43.942,28.718 v1(43.942,28.799) ; v1(45.033,21.247) 46.531,19.749 46.531,18.254 45.765,16.646 v1(45.765,12.066)
  Bottom Layer w0.254: v1(34.163,7.595) 34.412,7.595 35.006,7.001 40.7,7.001 v1(45.765,12.066) ; v1(43.942,28.799) 45.228,27.513 45.228,21.441 v1(45.033,21.247)
PA23: R31.1 U4.15 U4.19 | length 12.9
  Top Layer w0.254: v1(32.811,14.092) 32.811,14.151 32.02,14.943 32.02,18.035 31.871,18.184 31.289,18.184 30.664,18.809 30.664,19.693 31.289,20.318 32.173,20.318 32.847,19.644 U4.19
  Bottom Layer w0.254: R31.1 32.766,12.549 32.841,12.623 32.841,12.834 v1(32.811,14.092)
PA25: U3.41 U4.25 | length 7.5
  Top Layer w0.254: U4.25@35.235,22.644 36.84,22.644 39.482,25.286 U3.41
PA26: U3.38 U4.26 | length 8.7
  Top Layer w0.254: U4.26@35.235,23.146 35.378,23.146 36.874,24.642 36.874,25.695 38.37,27.191 U3.38
PA27: R.1 U4.37 | length 24.1
  Top Layer w0.254: U4.37 30.513,27.997 30.513,29.154 31.135,29.776 32.313,29.776 v1(33.429,30.593)
  Bottom Layer w0.254: v1(33.429,30.593) 33.429,28.305 37.388,24.346 R.1 42.551,21.961 44.774,24.183 44.774,25.067
PA28: R9.2 U4.38 | length 43.4
  Top Layer w0.254: R9.2 9.849,20.026 10.222,20.399 10.61,20.399 11.064,20.853 v1(11.339,20.853) ; U4.38 30.011,29.367 30.866,30.223 30.94,30.223 30.947,30.23 31.325,30.23 34.588,33.494 v1(34.902,35.139)
  Bottom Layer w0.254: v1(11.339,20.853) 11.339,22.259 19.421,30.341 19.421,33.208 21.351,35.139 34.898,35.139 v1@34.939,35.098
PA31: R20.1 U4.52 | length 51.4
  Top Layer w0.254: v1(17.511,29.94) 17.511,28.347 21.204,24.655 U4.52 ; v1(24.968,4.902) 25.163,5.097 25.817,5.097 26.545,5.825 R20.1
  Bottom Layer w0.254: v1(17.511,29.94) 11.705,29.94 9.732,27.967 9.732,20.31 14.01,16.032 18.632,16.032 19.3,15.364 24.903,9.115 24.968,9.042 v1(24.968,4.902)
PLLRC: C19.1 R28.1 U4.63 | length 35.6
  Top Layer w0.254: v1(17.442,14.261) 17.477,14.226 18.733,14.226 v1(19.682,13.278) ; v1@19.682,13.347 19.682,17.095 21.741,19.155 U4.63
  Bottom Layer w0.254: R28.1 11.852,1.497 12.001,1.348 17.21,1.348 19.682,3.819 v1(19.682,13.278) ; C19.1 14.448,11.267 17.401,14.22 v1@17.48,14.22
RESET: H4.10 U4.39 | length 17
  Top Layer w0.254: H4.10@28.855,41.418 29.209,41.418 31.879,38.747 32.644,38.747 33.463,37.929 33.463,33.118 31.03,30.684 30.759,30.684 30.752,30.677 30.678,30.677 29.511,29.509 U4.39@29.511,28.868
RTCK: H4.2 U4.53 | length 41.1
  Top Layer w0.254: v1(17.838,34.936) 17.838,34.661 17.287,34.11 17.287,31.224 16.444,30.382 16.444,28.772 21.062,24.155 U4.53 ; v1(39.091,38.429) 39.091,39.898 39.103,39.91 39.103,41.661 H4.2
  Bottom Layer w0.254: v1(17.838,34.936) 21.195,38.293 38.772,38.293 v1@38.941,38.125
TDI: H4.6 U4.33 | length 16.3
  Top Layer w0.254: U4.33@32.513,28.743 33.73,28.743 36.423,31.436 36.423,35.911 34.454,37.88 34.454,40.806 34.034,41.226 H4.6
TDO: H4.8 U4.49 | length 43
  Top Layer w0.254: v1(22.819,29.532) 21.592,28.305 21.592,26.303 21.741,26.155 U4.49
  Bottom Layer w0.254: v1(22.819,29.532) 22.998,29.708 23.072,29.781 23.177,29.781 30.941,29.72 30.989,29.72 ccw(c30.978,29.959) 31.063,29.736 32.987,31.659 33.871,31.659 34.496,31.035 34.496,30.601 34.782,30.314 36.453,30.314 36.859,30.72 36.859,32.238 38.419,33.798 39.062,33.798 40.77,35.506 40.77,36.734 40.341,37.163 40.341,38.688 39.533,39.496 36.432,39.496 35.683,38.747 32.582,38.747 31.494,39.835 31.494,41.318 H4.8@31.395,41.418
TMS: H4.4 U4.51 | length 35.8
  Top Layer w0.254: v1(18.354,33.371) 19.72,32.005 19.72,26.78 21.346,25.155 U4.51 ; H4.4 36.675,41.571 36.675,37.265 v1(36.759,37.182)
  Bottom Layer w0.254: v1(18.354,33.371) 22.146,37.164 36.741,37.164 v1(36.759,37.182)
TST: H3.10 U4.40 | length 29.1
  Top Layer w0.254: v1(26.412,40.145) 29.4,40.145 31.408,38.136 31.408,36.458 31.768,36.099 31.768,32.064 30.916,31.213 30.639,31.139 cw(c30.365,32.17) 30.468,31.108 29.057,29.697 29.011,29.546 U4.40
  Bottom Layer w0.254: H3.10 17.112,40.145 v1(26.412,40.145)
USB_DM: R4.2 U4.56 | length 15.6
  Top Layer w0.254: R4.2 9.84,24.711 11.372,26.243 18.083,26.243 21.671,22.655 U4.56
USB_DP: H3.16 R7.2 R9.1 U4.57 | length 30
  Top Layer w0.254: v1(7.77,17.813) 7.77,18.088 7.385,18.474 7.385,20.026 7.758,20.399 8.377,20.399 9.855,21.877 R7.2
  Bottom Layer w0.254: 7.4,18.393 7.77,18.022 v1(7.77,17.813) ; v1@7.795,18.393 H3.16
V_EXT: H2.19 Q1.3 R2.2 | length 57.5
  Top Layer w0.254: Q1.3 22.447,2.982 22.986,2.443 v1(24.721,2.443) ; v1(29.358,1.861) 31.317,1.861 31.949,2.493 R2.2
  Bottom Layer w0.254: v1(24.721,2.443) 26.164,0.999 34.133,0.999 ; v1(29.358,1.861) 33.272,1.861 34.133,0.999 ; H2.19 62.976,10.894 53.082,0.999 34.133,0.999
VT: H1.2 R32.1 U3.7 U3.18 U5.7 U5.18 | length 122.8
  Top Layer w0.254: U5.7 54.624,6.844 55.423,5.969 55.688,5.678 55.953,5.387 R32.1 56.962,4.482 56.005,5.439 56.005,13.8 54.489,15.315 53.606,15.315 52.981,14.691 52.981,14.531 52.396,13.946 52.334,13.946 52.216,13.829 U5.18 ; U3.7 52.329,24.651 52.446,24.533 52.509,24.533 53.186,23.856 53.186,23.53 53.577,23.14 55.223,23.14 55.372,23.289 55.372,31.394 55.131,31.636 ; U3.18 55.131,31.636 ; H1.2 57.105,45.601 58.834,45.601 66.901,37.535 66.901,6.549 60.985,0.633 58.708,0.633 58.022,1.32 58.022,3.022 56.962,4.082 R32.1@56.962,4.267 ; v1(61.062,36.093) 56.604,31.636 55.131,31.636
  Bottom Layer w0.254: H1.2 57.105,45.601 58.834,45.601 61.062,43.373 v1(61.062,36.093)
XIN: C21.1 U4.62 Y1.1 | length 9
  Top Layer w0.254: Y1.1 16.206,19.312 17.932,19.312 18.274,19.655 U4.62
Xout: C20.1 U4.61 Y1.2 | length 9.7
  Top Layer w0.254: Y1.2 17.249,23.014 18.027,22.236 18.521,22.236 18.521,21.942 20.308,20.155 U4.61
pads on no net: H2.17 H3.2 U2.0 U3.13 U3.14 U3.16 U3.17 U3.32 U3.33 U3.35 U3.36 U3.43 U4.6 U4.13 U4.23 U4.32 U4.42 U4.43 U5.3 U5.5 U5.6 U5.8 U5.9 U5.11 U5.12 U5.14 U5.16 U5.17 U5.19 U5.20 U5.22 U5.23 U5.26 U5.27 U5.29 U5.30 U5.32 U5.33 U5.35 U5.37 U5.38 U5.40 U5.41 U5.43 U5.44 U5.46

## Silkscreen, mask and mechanical layers (free items; w line width, h text height)
Top Overlay:
  drawing of 15 lines, arcs and shapes, not listed